# Altium PCB PCB1.PcbDoc
Units mm, origin at the board's own origin, x right, y up, seen from the top; angles counter-clockwise.
Board outline 152.4 x 101.6 mm, 2 copper layers (Top Layer, Bottom Layer); 12 components, 8 nets, 47 pads, 0 vias.
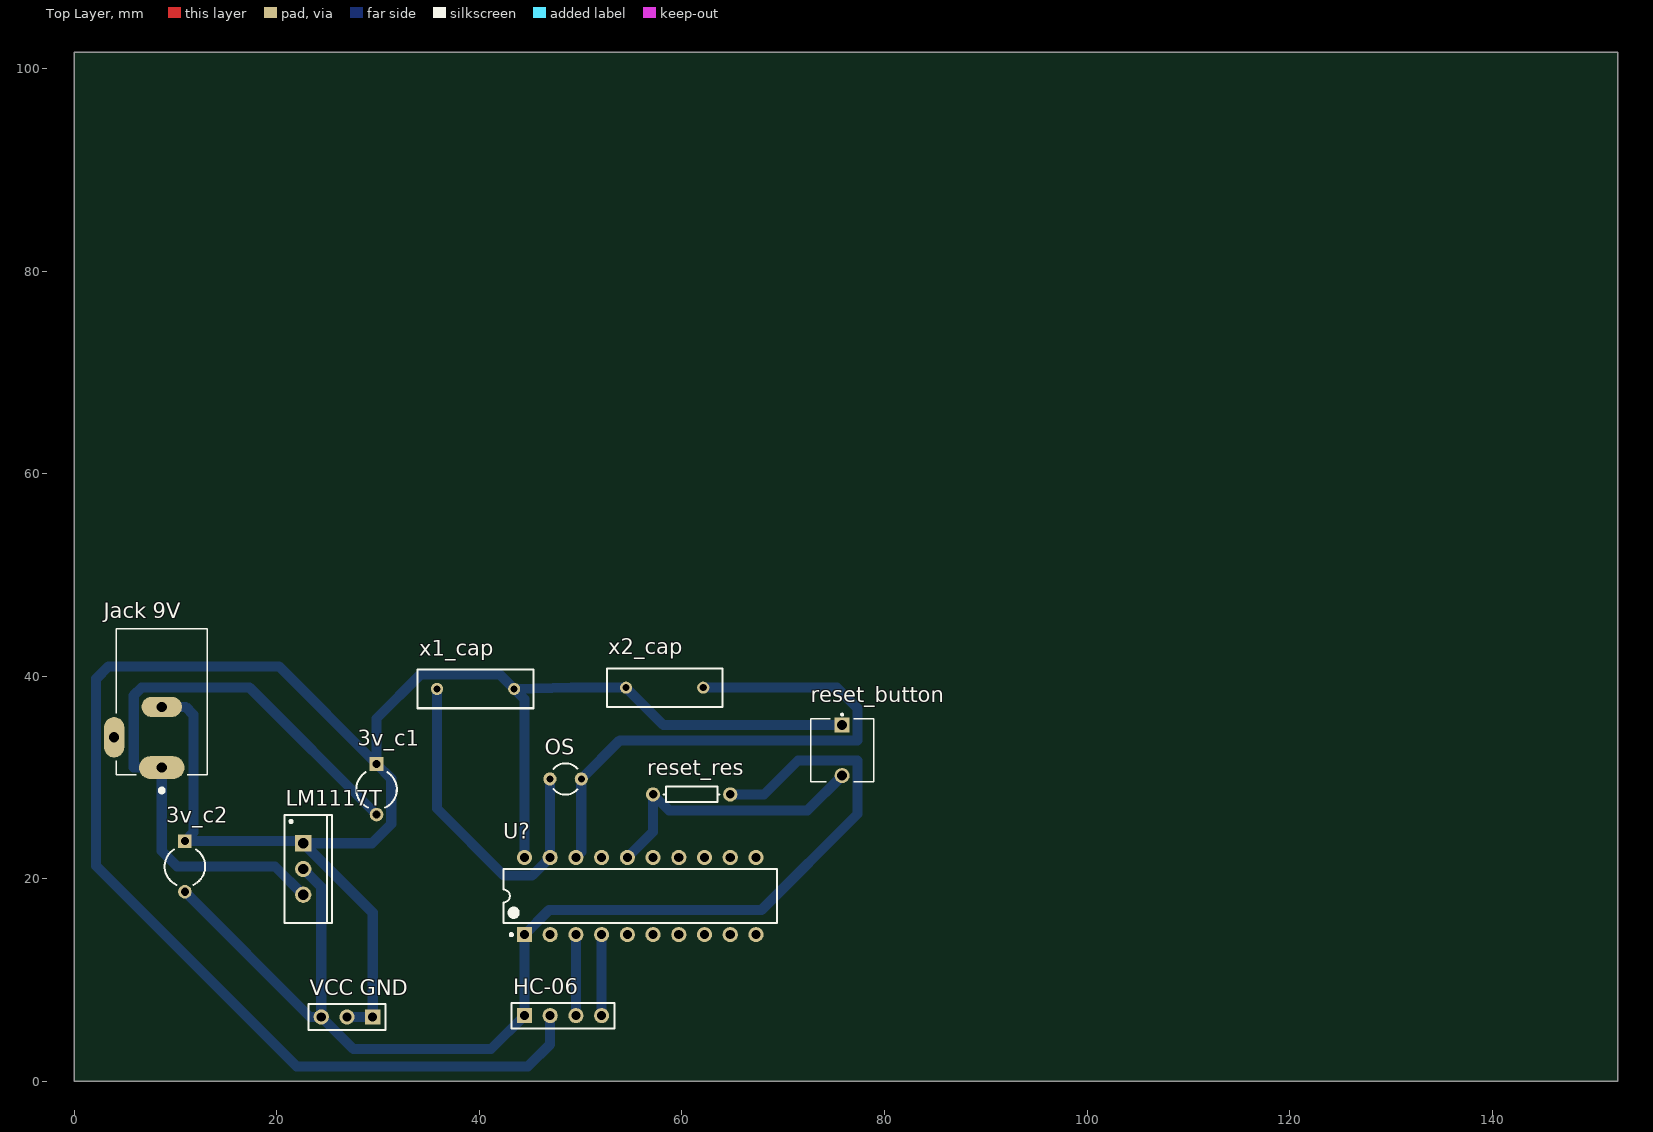
[diagram p0: Top Layer view]
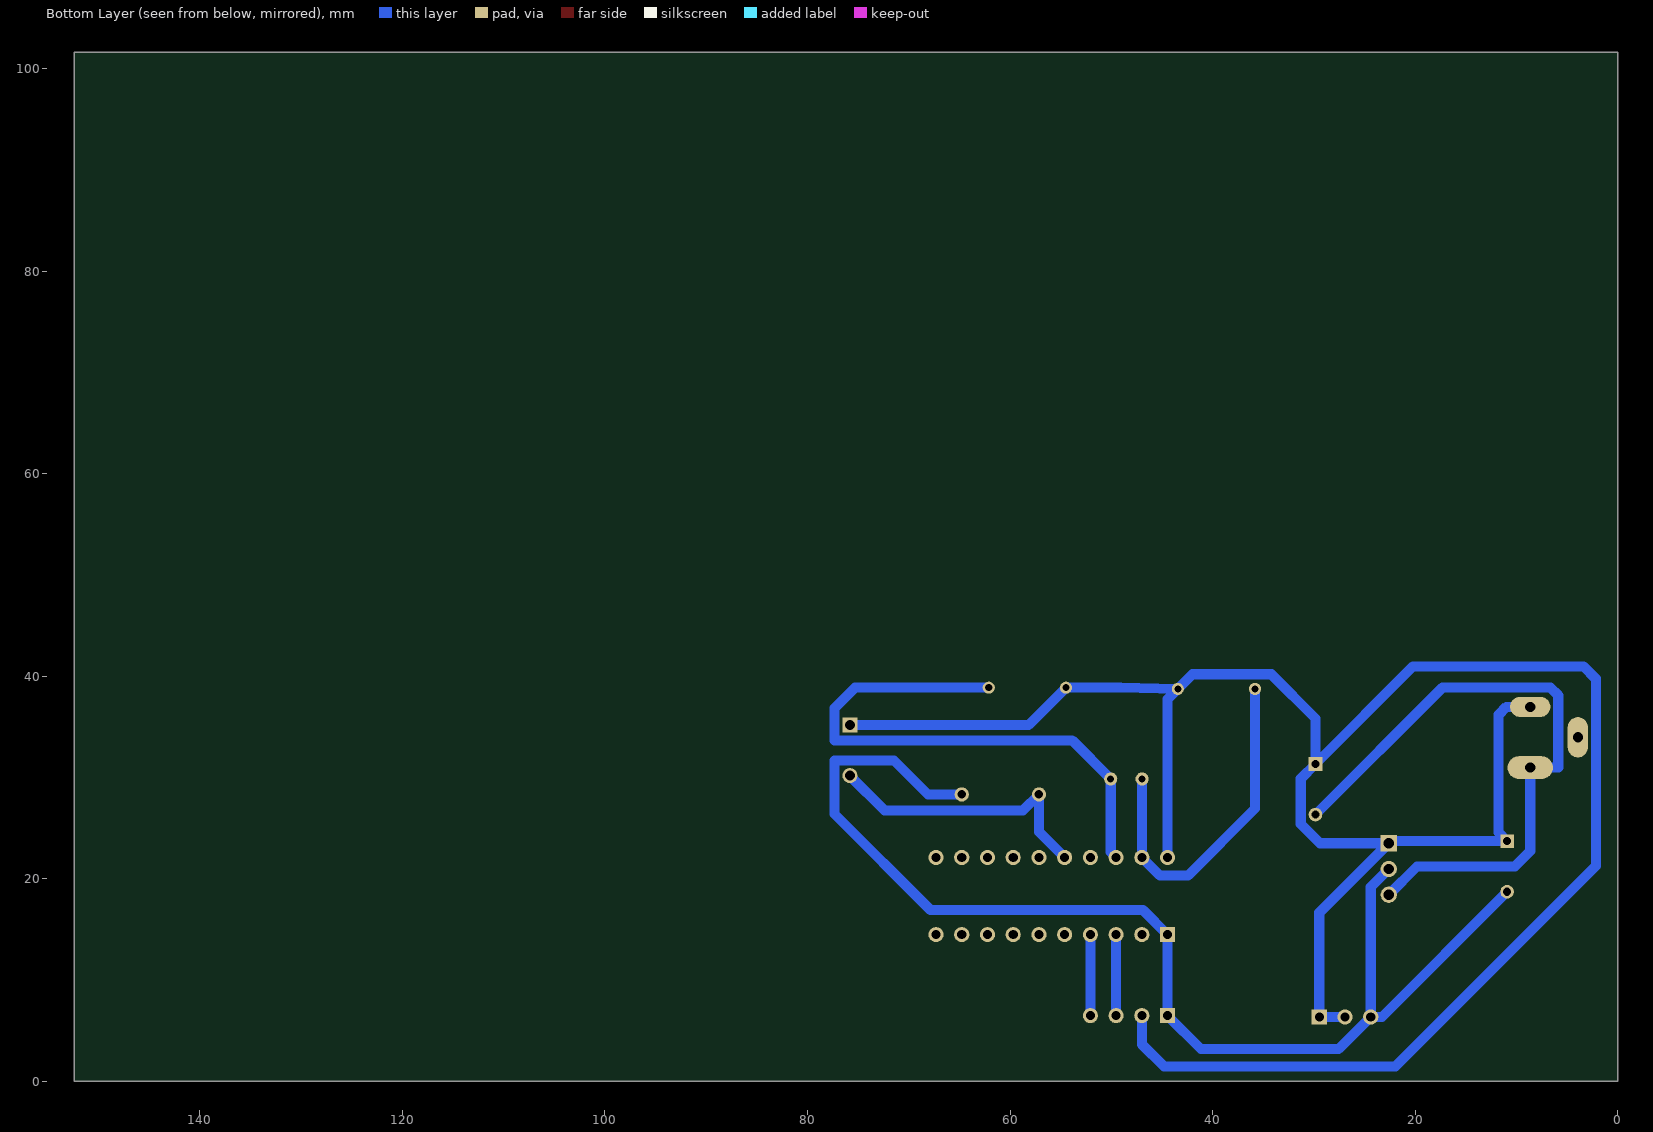
[diagram p1: Bottom Layer view, seen from below]

## Layer stack, top to bottom
Top Solder: solder mask 0.0102, Solder Resist, Dk 3.5
Top Layer: signal copper 0.0356
Dielectric 1: dielectric 0.32, FR-4, Dk 4.8
Bottom Layer: signal copper 0.0356
Bottom Solder: solder mask 0.0102, Solder Resist, Dk 3.5

## Board outline
0,0 152.4,0 152.4,101.6 0,101.6

## Design rules (kind name [scope] priority, off if disabled: settings)
Clearance [All] p1: gap=0.254
PolygonConnect [All] p1: connectstyle=Relief reliefconductorwidth=0.254 reliefentries=4 polygonreliefangle="90 Angle" airgapwidth=0.254
RoomDefinition Sheet1 [InComponentClass('Sheet1')] p1: confinementstyle=ConfineIn formatcopy=TRUE lockcomponents=FALSE outline 0,0 91.186,0 91.186,46.482 0,46.482
RoutingVias [All] p1: holewidth=0.711 width=1.27 viastyle="Through Hole" minholewidth=0.711 minwidth=1.27 maxholewidth=0.711 maxwidth=1.27
SolderMaskExpansion [All] p1: expansion=0.102
Width [All] p1: maxlimit=1 minlimit=1 preferedwidth=1 minimp=50.000000 maximp=50.000000 favimp=50.000000
30 further rules are at their usual default settings.

## Classes and differential pairs
component class Sheet1: 3v_c1 3v_c2 HC-06 Jack LM1117T OS reset_button reset_res U? x1_cap x2_cap

## Components (designator, comment, footprint, x,y, rotation, side; value= is the part's Value field where it differs from the comment)
3v_c1 "Cap2" CAPR5-4X5 29.845,28.829 r270 top
3v_c2 "Cap2" CAPR5-4X5 10.922,21.209 r270 top
HC-06 "Bluetooth Module" HDR1X4 44.45,6.477 r0 top
"Jack 9V" "PJ-002BH" CUI_PJ-002BH 8.636,37.465 r90 top
LM1117T "LM1117T-3.3" T03B 22.606,20.955 r270 top
OS "XTAL" R38 48.514,29.845 r270 top
reset_button "FSM8JRT _147694-1_" TE_FSM8JRT 75.819,35.179 r270 top
reset_res "Res1" AXIAL-0.3 60.96,28.321 r180 top
U? "MSP430G2533IN20" TI-N20 55.88,18.288 r90 top
"VCC GND" "Header 3" HDR1X3 29.464,6.35 r180 top
x1_cap "x1_Cap" RAD-0.3 39.624,38.735 r0 top
x2_cap "x2_Cap" RAD-0.3 58.293,38.862 r180 top

## Footprints (in the part's own frame and the unit in brackets; to place one, negate y for a bottom-side part, rotate by r counter-clockwise, add the part's x,y. Pads: shape width x height; smd on the part's side, far side on the other; paste and mask are expansions set on the pad)
AXIAL-0.3 [mm] "Axial Device, Thru-Hole; 2 Leads; 0.3 in Pin Spacing"
  round 1.4 hole 0.85: 1(-3.81,0) 2(3.81,0)
  silkscreen extent -2.77,-0.76 2.77,0.76
CAPR5-4X5 [mm] "Capacitor; 2 Leads"
  rect 1.35x1.35 hole 0.8: 1(-2.5,0)
  round 1.35 hole 0.8: 2(2.5,0)
  silkscreen extent -1.69,-2 1.82,2
CUI_PJ-002BH [mm]
  oval 2.25x4.5 hole 1: 1(-6.5,0)
  oval 2x4 hole 1: 2(-0.5,0)
  oval 4x2 hole 1: 3(-3.5,4.7)
  silkscreen extent -8.94,-4.5 7.2,4.5
HDR1X3 [mm] "Connector; Header; 3 Position"
  rect 1.5x1.5 hole 0.9: 1(0,0)
  round 1.5 hole 0.9: 2(2.54,0) 3(5.08,0)
  silkscreen extent -1.27,-1.27 6.35,1.27
HDR1X4 [mm] "Connector; Header; 4 Position"
  rect 1.5x1.5 hole 0.9: 1(0,0)
  round 1.5 hole 0.9: 2(2.54,0) 3(5.08,0) 4(7.62,0)
  silkscreen extent -1.27,-1.27 8.89,1.27
R38 [mm] "Crystal, Thru-Hole; 2 Leads; Body 3.1 x 8.2 mm (Dia.xH)"
  round 1.3 hole 0.7: 1(0,1.55) 2(0,-1.55)
  silkscreen extent -1.55,-1.19 1.55,1.17
RAD-0.3 [mm] "Radial Cap, Thru-Hole; 2 Leads; 0.3 in Pin Spacing"
  round 1.2 hole 0.7: 1(-3.81,0) 2(3.81,0)
  silkscreen extent -5.71,-1.91 5.71,1.91
T03B [mm] "TO, Thru-Hole, Vertical, Heatsink Mounted; 3 In-Line Leads; Pitch 2.54 mm"
  rect 1.6x1.6 hole 1: 1(-2.54,0)
  round 1.6 hole 1: 2(0,0) 3(2.54,0)
  silkscreen extent -5.35,-1.85 5.35,2.85, body extent -5.4,-1.9 5.4,2.9, height 19.4
TE_FSM8JRT [mil]
  rect 59x59 hole 39: 1(0,0)
  round 59 hole 39: 2(197,0)
  silkscreen extent -44,-122 221,122
TI-N20 [mm] "DIP, 20-Leads, Body 25.4x6.35 mm, Pitch 2.54 mm"
  rect 1.5x1.5 hole 0.9: 1(-3.81,11.43)
  round 1.5 hole 0.9: 2(-3.81,8.89) 3(-3.81,6.35) 4(-3.81,3.81) 5(-3.81,1.27) 6(-3.81,-1.27) 7(-3.81,-3.81) 8(-3.81,-6.35) 9(-3.81,-8.89) 10(-3.81,-11.43) 11(3.81,-11.43) 12(3.81,-8.89) 13(3.81,-6.35) 14(3.81,-3.81) 15(3.81,-1.27) 16(3.81,1.27) 17(3.81,3.81) 18(3.81,6.35) 19(3.81,8.89) 20(3.81,11.43)
  silkscreen extent -3.93,-13.5 2.65,13.5, body extent -3.95,-13.45 3.95,13.45, height 5.08

## Part data
3v_c1 3v_c2: "Capacitor"
HC-06: library part "Header 4", "Header, 4-Pin"
"Jack 9V": "2.5 mm Center Pin, 5.0 A, Right Angle, Through Hole, Dc Power Jack Connector"
LM1117T: "800mA Low-Dropout Linear Regulator, 3-pin TO-220"
OS: "Crystal Oscillator"
reset_button: library part FSM8JRT, "FSM8JRT=SWITCH,PUSHBUTTON,TACT"
reset_res: "Resistor"
U?: "16 MHz Mixed Signal Microcontroller with 16 KB Flash, 512 B SRAM and 24 GPIOs, -40 to 85 degC, 20-pin DIP (N), Pb-Free (RoHS)"
"VCC GND": "Header, 3-Pin"
x1_cap x2_cap: library part Cap, "Capacitor"

## Nets (pads, with @x,y where several pads share a name; then routed paths per layer and width w, separated by ;. In a path a pad name is that pad's centre, name@x,y a point inside that pad or via, vN(x,y) a via of type N, cw(c..) or ccw(c..) an arc to the next point about the centre after c; other vN are vias at no path point)
GND: 3v_c1.1 3v_c2.1 "Jack 9V.2" "VCC GND.1" "VCC GND.2" HC-06.2 LM1117T.1 reset_button.1 U?.20 x1_cap.2 x2_cap.2 | length 245.2
  Bottom Layer w1: 8.636,36.965 10.99,36.965 11.76,36.195 11.76,24.547 3v_c2.1 LM1117T.1@22.392,23.709 ; 26.924,6.35 29.464,6.35 29.464,16.637 LM1117T.1 29.388,23.495 31.293,25.4 31.293,29.881 3v_c1.1 ; U?.20 44.45,37.719 x1_cap.2 ; HC-06.2 46.99,3.658 44.78,1.448 21.971,1.448 2.159,21.26 2.159,39.751 3.378,40.97 20.204,40.97 3v_c1.1 ; reset_button.1 58.166,35.179 x2_cap.2 49.098,38.862 x1_cap.2 ; 3v_c1.1 29.845,35.814 34.214,40.183 41.986,40.183 x1_cap.2
Net3v_c1_2: 3v_c1.2 "Jack 9V.1" LM1117T.3 | length 63.4
  Bottom Layer w1: LM1117T.3 19.812,21.209 10.16,21.209 8.636,22.733 8.636,30.965 5.867,30.965 5.867,38.1 6.629,38.862 17.312,38.862 3v_c1.2
Net3v_c2_2: 3v_c2.2 "VCC GND.3" HC-06.1 LM1117T.2 reset_res.1 U?.1 | length 121.8
  Bottom Layer w1: 3v_c2.2 23.281,6.35 24.384,6.35 ; LM1117T.2 24.384,19.177 24.384,6.35 ; reset_res.1 68.097,28.321 71.455,31.679 77.343,31.679 77.343,26.391 67.843,16.891 46.863,16.891 U?.1 HC-06.1 41.148,3.175 27.559,3.175 24.384,6.35
NetHC-06_3: HC-06.3 U?.3 | length 8
  Bottom Layer w1: HC-06.3 U?.3
NetHC-06_4: HC-06.4 U?.4 | length 8
  Bottom Layer w1: HC-06.4 U?.4
NetOS_1: OS.1 U?.18 x2_cap.1 | length 56.1
  Bottom Layer w1: U?.18 50.064,22.632 OS.1 53.874,33.655 77.343,33.655 77.343,36.83 75.311,38.862 x2_cap.1
NetOS_2: OS.2 U?.19 x1_cap.1 | length 34.2
  Bottom Layer w1: x1_cap.1 35.814,26.924 42.418,20.32 45.212,20.32 U?.19 46.964,25.985 OS.2
Netreset_button_2: reset_button.2 reset_res.2 U?.16 | length 28
  Bottom Layer w1: U?.16 57.15,24.638 reset_res.2 58.725,26.746 72.39,26.746 reset_button.2
pads on no net: "Jack 9V.3" U?.2 U?.5 U?.6 U?.7 U?.8 U?.9 U?.10 U?.11 U?.12 U?.13 U?.14 U?.15 U?.17